# Altium PCB PCB1.PcbDoc
Units mm, origin at the board's own origin, x right, y up, seen from the top; angles counter-clockwise.
Board outline 24.65 x 23.5 mm, 4 copper layers (Top Layer, Layer 1, Layer 2, Bottom Layer), stack 1.592 mm thick; 2 components, 19 nets, 42 pads, 5 vias.
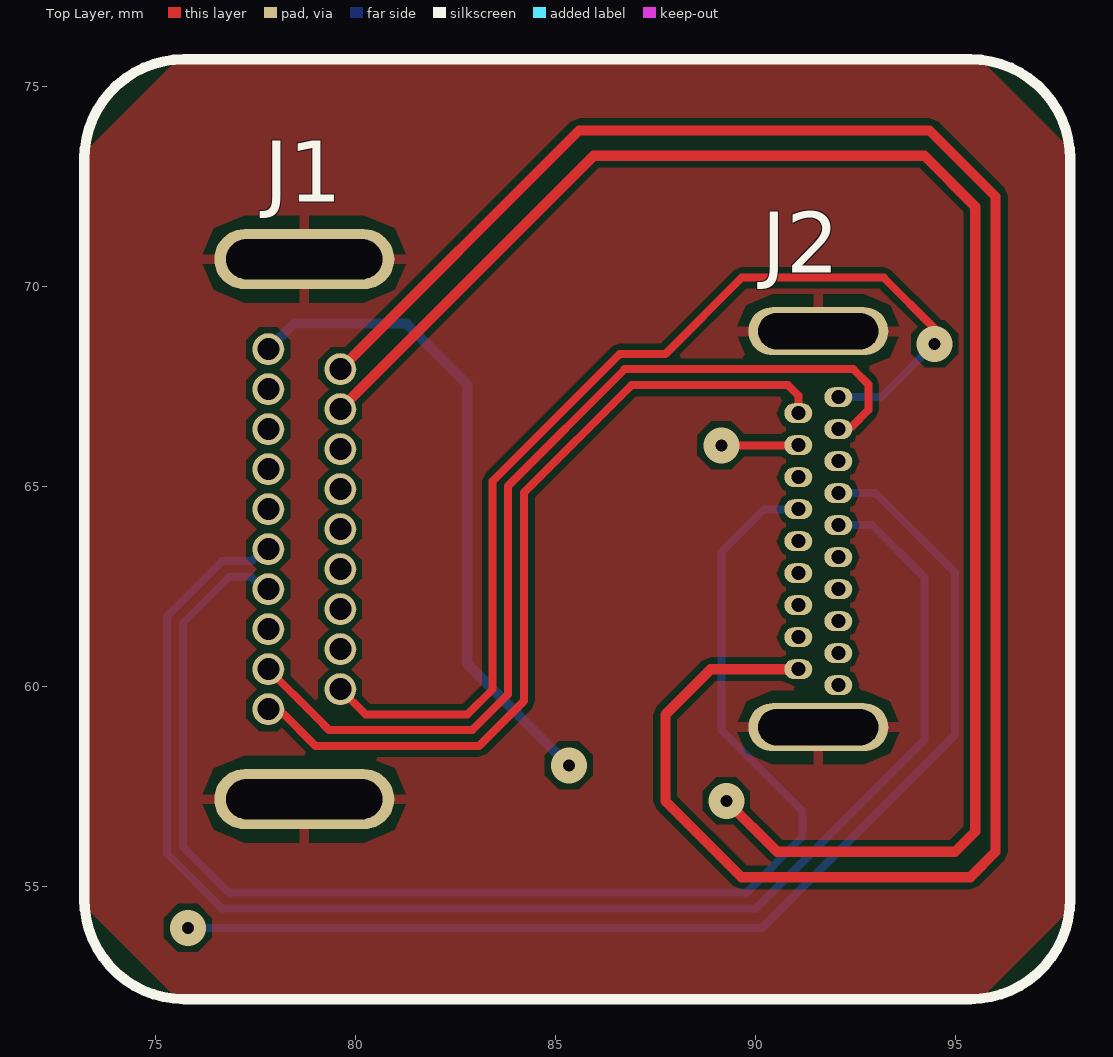
[diagram p0: Top Layer view]
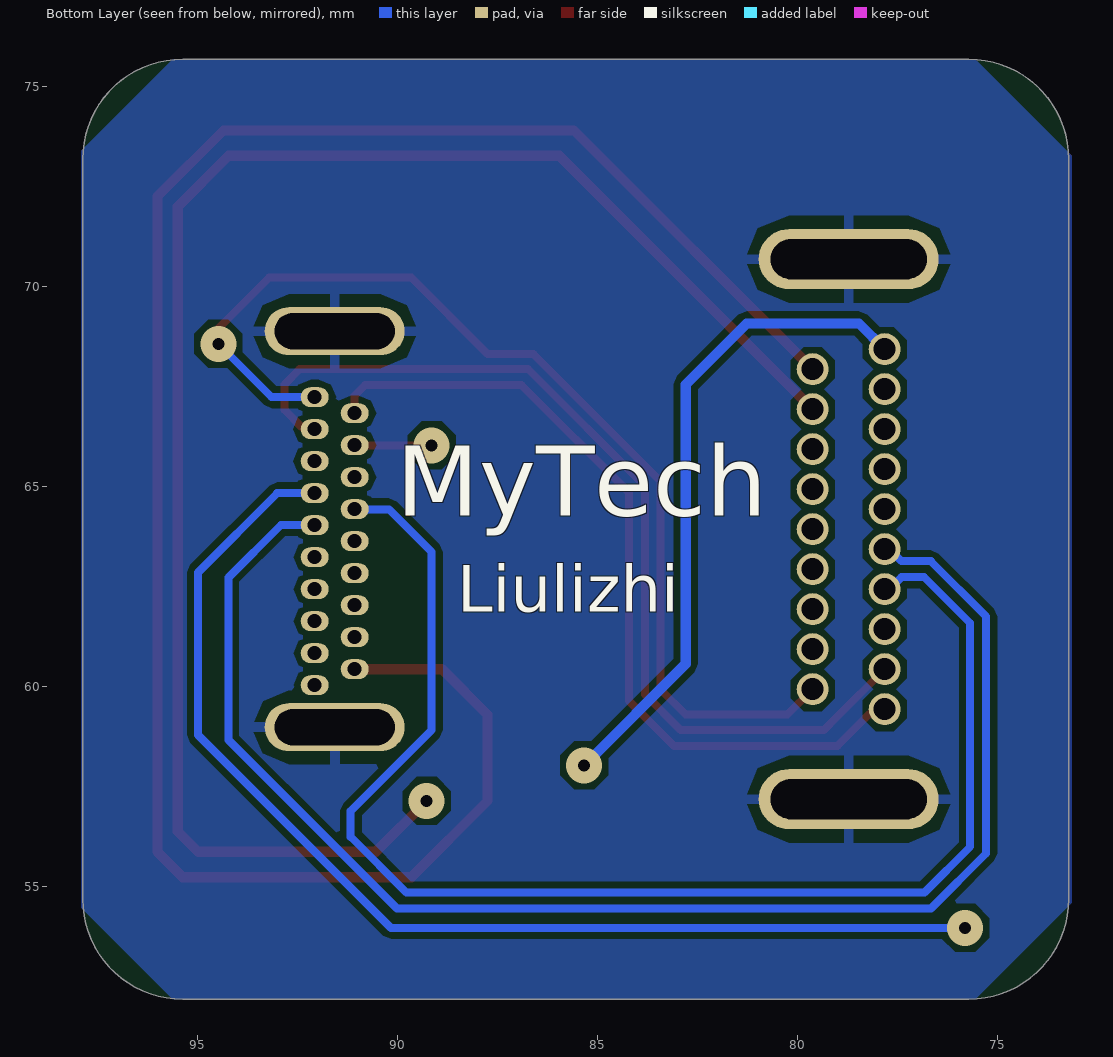
[diagram p1: Bottom Layer view, seen from below]
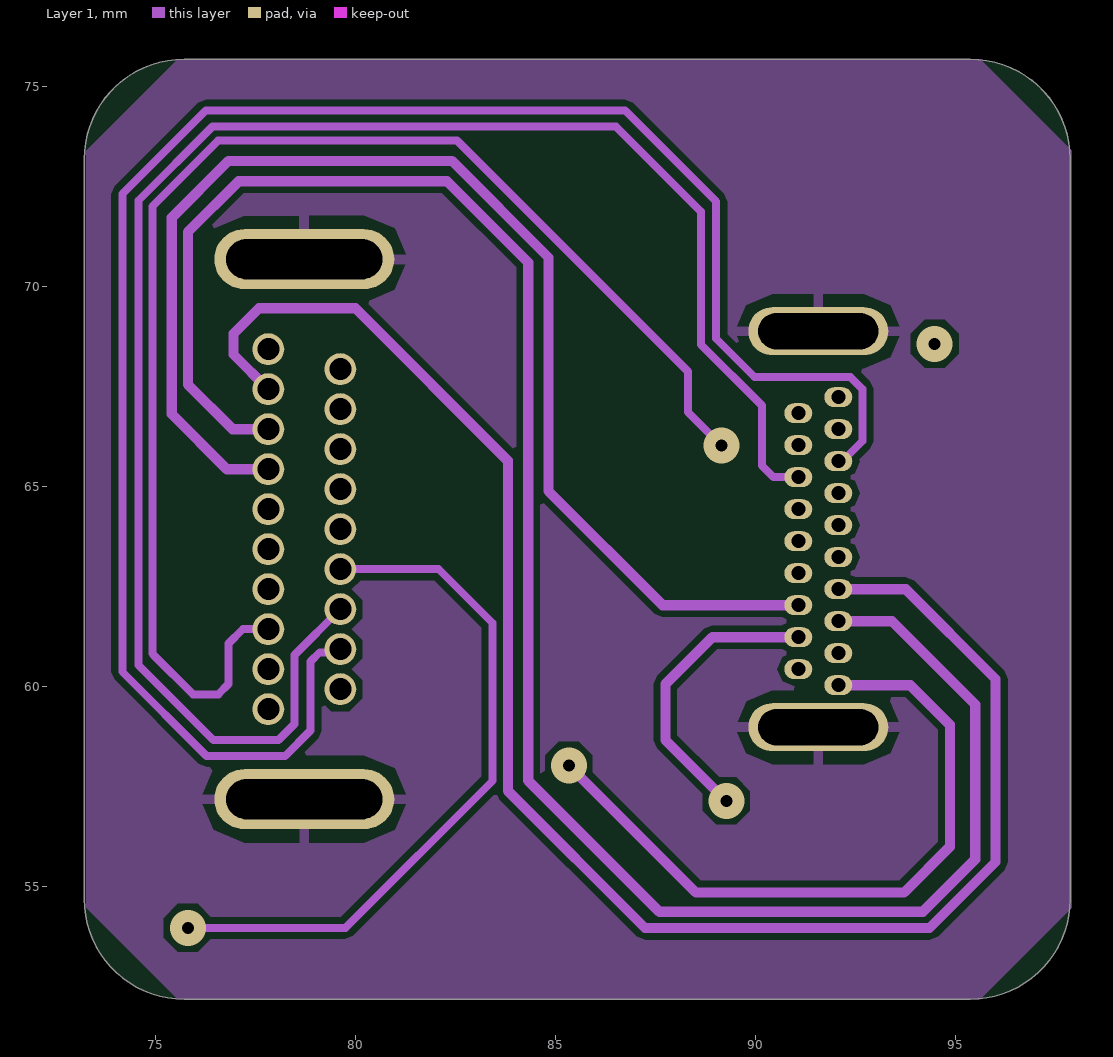
[diagram p2: Layer 1]
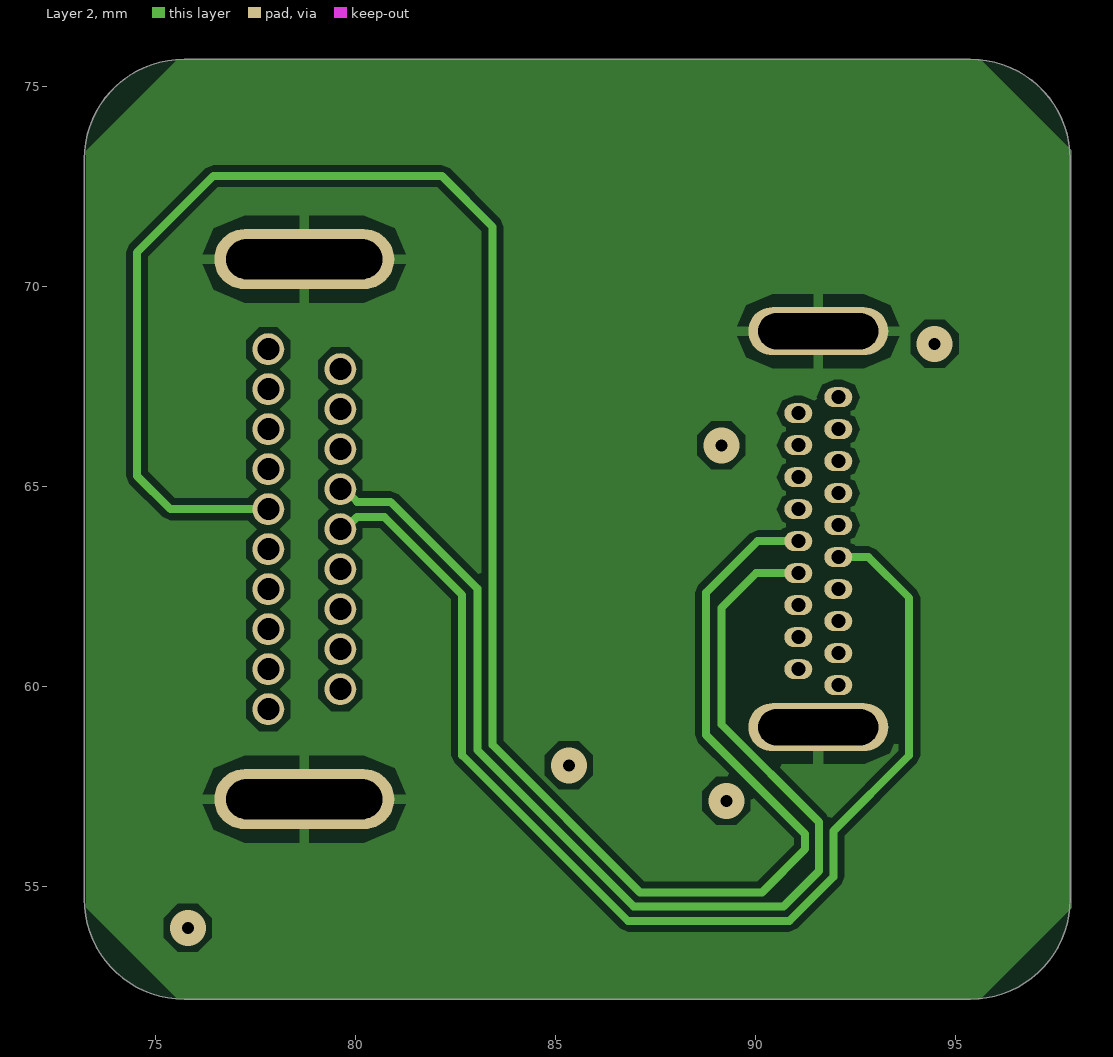
[diagram p3: Layer 2]

## Layer stack, top to bottom
Top Solder: solder mask 0.0102, Solder Resist, Dk 3.5
Top Layer: signal copper 0.035
Dielectric 2: prepreg 0.2104, PP-006, Dk 4.1
Layer 1: signal copper 0.018
Dielectric 1: dielectric 1.065, FR-4, Dk 4.8
Layer 2: signal copper 0.018
Dielectric 3: prepreg 0.2104, PP-006, Dk 4.1
Bottom Layer: signal copper 0.035
Bottom Solder: solder mask 0.0102, Solder Resist, Dk 3.5

## Board outline
73.229,54.695 73.229,73.195 cw(c75.729,73.195) 75.729,75.695 95.379,75.695 cw(c95.379,73.195) 97.879,73.195 97.879,54.695 cw(c95.379,54.695) 95.379,52.195 75.729,52.195 cw(c75.729,54.695)

## Design rules (kind name [scope] priority, off if disabled: settings)
Clearance [All] p1: gap=0.15 ignorepadtopadclearanceinfootprint=FALSE
DiffPairsRouting [All] p1: maxlimit=0.254 minlimit=0.1 mostfreqgap=0.2 toplayer_minwidth=0.15 toplayer_maxwidth=0.381 toplayer_prefwidth=0.2 midlayer1_minwidth=0.15 midlayer1_maxwidth=0.381 midlayer1_prefwidth=0.2 midlayer2_minwidth=0.15 midlayer2_maxwidth=0.381 midlayer2_prefwidth=0.2 bottomlayer_minwidth=0.15 bottomlayer_maxwidth=0.381 bottomlayer_prefwidth=0.2 maxuncoupledlength=0.15
HoleSize [All] p1: absolutevalues=TRUE maxlimit=6.3 minlimit=0.025 maxpercent=80.000 minpercent=20.000
MinimumSolderMaskSliver [All] p1: minsoldermaskwidth=0.09
PolygonConnect [All] p1: connectstyle=Relief reliefconductorwidth=0.254 reliefentries=4 polygonreliefangle="90 Angle" airgapwidth=0.254
RoutingVias [All] p1: holewidth=0.3 width=0.9 viastyle="Through Hole" minholewidth=0.15 minwidth=0.8 maxholewidth=6.3 maxwidth=8
SolderMaskExpansion [All] p1: expansion=0.102 istentingtop=FALSE
Width [All] p1: maxlimit=0.254 minlimit=0.1 preferedwidth=0.2
27 further rules are at their usual default settings.

## Classes and differential pairs
differential pair D2: +D2_P -D2_N
differential pair D1: +D1_P -D1_N
differential pair D0: +D0_P -D0_N
differential pair CLK: +CLK_P -CLK_N

## Components (designator, comment, footprint, x,y, rotation, side; value= is the part's Value field where it differs from the comment)
J1 "HDMI_A" HDMI_A_Plug_19P 77.829,59.445 r270 top locked
J2 "HDMI_C" HDMI_C_Plug_19P 92.079,67.245 r90 top locked

## Footprints (in the part's own frame and the unit in brackets; to place one, negate y for a bottom-side part, rotate by r counter-clockwise, add the part's x,y. Pads: shape width x height; smd on the part's side, far side on the other; paste and mask are expansions set on the pad)
HDMI_A_Plug_19P [mm]
  round 0.8 hole 0.55: 1(0,0) 2(-0.5,1.8) 3(-1,0) 4(-1.5,1.8) 5(-2,0) 6(-2.5,1.8) 7(-3,0) 8(-3.5,1.8) 9(-4,0) 10(-4.5,1.8) 11(-5,0) 12(-5.5,1.8) 13(-6,0) 14(-6.5,1.8) 15(-7,0) 16(-7.5,1.8) 17(-8,0) 18(-8.5,1.8) 19(-9,0)
  oval 1.5x4.5 hole 1 slot 3.9 at 90 deg: 20(2.25,0.9) 21(-11.25,0.9)
  body extent -11.65,-1.52 2.64,3.32, height 12.52
HDMI_C_Plug_19P [mm]
  oval 0.5x0.7 hole 0.35: 1(0,0) 2(-0.4,1) 3(-0.8,0) 4(-1.2,1) 5(-1.6,0) 6(-2,1) 7(-2.4,0) 8(-2.8,1) 9(-3.2,0) 10(-3.6,1) 11(-4,0) 12(-4.4,1) 13(-4.8,0) 14(-5.2,1) 15(-5.6,0) 16(-6,1) 17(-6.4,0) 18(-6.8,1) 19(-7.2,0)
  oval 1.2x3.5 hole 0.9 slot 3 at 90 deg: 20(1.65,0.5) 21(-8.25,0.5)
  body extent -8.55,-0.75 1.95,1.75, height 10.45

## Part data
J1: library part HDMI_A_Plug_19P, "HDMI A公头插板19pin"
J2: library part HDMI_C_Plug_19P, "HDMI C公头插板19pin"

## Via types
v1: diameter 0.9, hole 0.3, Top Layer to Bottom Layer, tented both sides, 5 vias

## Nets (pads, with @x,y where several pads share a name; then routed paths per layer and width w, separated by ;. In a path a pad name is that pad's centre, name@x,y a point inside that pad or via, vN(x,y) a via of type N, cw(c..) or ccw(c..) an arc to the next point about the centre after c; other vN are vias at no path point)
5V: J1.18 J2.18 | length 51.2
  Top Layer w0.254: J1.18 85.598,73.914 94.361,73.914 96.012,72.263 96.012,55.88 95.377,55.245 89.662,55.245 87.757,57.15 87.757,59.309 88.893,60.445 J2.18
CEC: J1.13 J2.14 | length 32.2
  Layer 1 w0.254: J1.13 76.795,65.445 75.415,66.825 75.415,71.732 76.835,73.152 82.423,73.152 84.836,70.739 84.836,64.897 87.688,62.045 J2.14
CEC_GND: J1.17 J2.13 | length 42.4
  Layer 1 w0.254: J1.17 76.962,68.312 76.962,68.834 77.597,69.469 80.01,69.469 83.82,65.659 83.82,57.404 87.249,53.975 94.361,53.975 96.012,55.626 96.012,60.198 93.765,62.445 J2.13
CLK_N: J1.12 J2.12 | length 28.9
  Layer 2 w0.2: J1.12 79.737,64.945 80.053,64.629 80.887,64.629 83.058,62.458 83.058,58.42 86.965,54.513 90.71,54.513 91.599,55.402 91.599,56.623 89.154,59.068 89.154,61.976 90.023,62.845 J2.12
CLK_P: J1.10 J2.11 | length 29.5
  Layer 2 w0.2: J1.10 79.734,63.84 79.734,63.935 80.046,64.248 80.729,64.248 82.677,62.3 82.677,58.293 86.817,54.153 90.858,54.153 91.959,55.254 91.959,56.399 93.853,58.293 93.853,62.23 92.838,63.245 J2.11
CLKS: J1.11 J2.10 | length 52.4
  Layer 2 w0.2: J1.11 75.382,64.445 74.549,65.278 74.549,70.866 76.454,72.771 82.169,72.771 83.439,71.501 83.439,58.547 87.122,54.864 90.17,54.864 91.249,55.943 91.249,56.325 88.773,58.801 88.773,62.357 90.061,63.645 J2.10
D0_N: J1.9 J2.9 | length 37.2
  Bottom Layer w0.2: J1.9 77.712,63.445 77.412,63.145 76.676,63.145 75.292,61.761 75.292,55.841 76.669,54.464 90.024,54.464 94.234,58.674 94.234,62.738 92.927,64.045 J2.9
D0_P: J1.7 J2.8 | length 35.2
  Bottom Layer w0.2: J1.7 77.712,62.445 77.412,62.745 76.842,62.745 75.692,61.595 75.692,56.007 76.835,54.864 89.789,54.864 91.179,56.254 91.179,56.903 89.154,58.928 89.154,63.373 90.223,64.442 91.076,64.442 J2.8
D0S: J1.8 J2.7 | length 46.4
  Layer 1 w0.2: v1(75.819,53.975) 79.756,53.975 83.439,57.658 83.439,61.595 82.089,62.945 J1.8
  Bottom Layer w0.2: v1(75.819,53.975) 90.17,53.975 94.996,58.801 94.996,62.865 93.016,64.845 J2.7
D1_N: J1.6 J2.6 | length 43.5
  Layer 1 w0.2: J1.6 78.486,60.802 78.486,59.074 78.086,58.674 76.454,58.674 74.58,60.548 74.58,71.418 74.58,72.157 76.433,74.01 86.518,74.01 88.646,71.882 88.646,68.558 90.17,67.034 90.17,65.532 90.457,65.245 J2.6
D1_P: J1.4 J2.5 | length 46.7
  Layer 1 w0.2: J1.4 79.551,60.867 79.117,60.867 78.886,60.636 78.886,58.908 78.252,58.274 76.288,58.274 74.18,60.382 74.18,71.418 74.18,72.323 76.267,74.41 76.689,74.41 86.753,74.41 89.027,72.136 89.027,68.707 89.989,67.745 92.386,67.745 92.679,67.452 92.679,66.145 92.179,65.645 J2.5
D1S: J1.5 J2.4 | length 36.4
  Top Layer w0.2: v1(89.154,66.04) 89.156,66.042 91.077,66.042 J2.4
  Layer 1 w0.2: J1.5 77.193,61.445 76.835,61.087 76.835,60.071 76.581,59.817 75.946,59.817 74.989,60.774 74.93,60.833 74.93,72.012 76.578,73.66 82.55,73.66 88.325,67.885 88.325,66.869 v1(89.154,66.04)
D2_N: J1.3 J2.3 | length 24.2
  Top Layer w0.2: J1.3 79.039,59.235 79.346,58.928 82.931,58.928 83.82,59.817 83.82,65.024 86.741,67.945 92.456,67.945 92.837,67.564 92.837,66.929 92.41,66.502 92.136,66.502 J2.3
D2_P: J1.1 J2.2 | length 21
  Top Layer w0.2: J1.1 77.944,59.33 78.211,59.33 79.013,58.528 83.097,58.528 84.22,59.651 84.22,64.858 86.907,67.545 90.824,67.545 91.079,67.29 J2.2
D2S: J1.2 J2.1 | length 26.6
  Top Layer w0.2: J1.2 80.265,59.309 82.804,59.309 83.439,59.944 83.439,65.151 86.614,68.326 87.757,68.326 89.662,70.231 93.218,70.231 94.488,68.961 v1(94.488,68.58)
  Bottom Layer w0.2: J2.1 93.153,67.245 v1(94.488,68.58)
GND: J1.20 J1.21 J2.20 J2.21
HOT_PLUG: J1.19 J2.19 | length 34
  Layer 1 w0.254: v1(85.344,58.039) 88.519,54.864 93.726,54.864 94.869,56.007 94.869,59.055 93.879,60.045 J2.19
  Bottom Layer w0.254: J1.19 78.472,69.088 81.28,69.088 82.804,67.564 82.804,60.579 v1(85.344,58.039)
SCL: J1.15 J2.15 | length 50.4
  Layer 1 w0.254: J1.15 76.938,66.445 75.819,67.564 75.819,71.374 77.089,72.644 82.296,72.644 84.328,70.612 84.328,57.658 87.607,54.379 94.194,54.379 95.504,55.689 95.504,59.563 93.422,61.645 J2.15
SDA: J1.16 J2.16 | length 49
  Top Layer w0.254: J1.16 85.963,73.279 94.234,73.279 95.504,72.009 95.504,56.388 94.996,55.88 90.551,55.88 v1(89.281,57.15)
  Layer 1 w0.254: v1(89.281,57.15) 87.757,58.674 87.757,60.071 88.931,61.245 J2.16
pads on no net: J1.14 J2.17

## Polygon pours and split planes (outlines as drawn)
GND on Top Layer "GND_L01_P000" (solid, remove dead copper, pour order 0): 75.565,75.692 95.631,75.692 97.917,73.406 97.917,54.483 95.631,52.197 75.565,52.197 73.279,54.483 73.279,73.406
GND on Layer 1 "GND_L02_P001" (solid, remove dead copper, pour order 1): 75.565,75.692 95.631,75.692 97.917,73.406 97.917,54.483 95.631,52.197 75.565,52.197 73.279,54.483 73.279,73.406
GND on Layer 2 "GND_L03_P002" (solid, remove dead copper, pour order 2): 75.565,75.692 95.631,75.692 97.917,73.406 97.917,54.483 95.631,52.197 75.565,52.197 73.279,54.483 73.279,73.406
GND on Bottom Layer "GND_L04_P003" (solid, remove dead copper, pour order 3): 75.565,75.692 95.631,75.692 97.917,73.406 97.917,54.483 95.631,52.197 75.565,52.197 73.152,54.61 73.152,73.279 73.279,73.406

## Silkscreen, mask and mechanical layers (free items; w line width, h text height)
Top Overlay:
  lines w0.254: 73.229,54.695 ccw(c75.729,54.695) 75.729,52.195 95.379,52.195 ccw(c95.379,54.695) 97.879,54.695 97.879,63.945 97.879,73.195 ccw(c95.379,73.195) 95.379,75.695 75.729,75.695 ccw(c75.729,73.195) 73.229,73.195 73.229,63.945 73.229,54.695
Bottom Overlay:
  text "MyTech" at 90.043,63.702 h3
  text "Liulizhi" at 88.519,61.493 h2